# Altium PCB DK-PM-FV-VC-Buck_NonIsolated_V1.0.PcbDoc
Units mm, origin at the board's own origin, x right, y up, seen from the top; angles counter-clockwise.
Board outline 48.25 x 57.25 mm, 2 copper layers (Top Layer, Bottom Layer); 31 components, 19 nets, 82 pads, 0 vias.
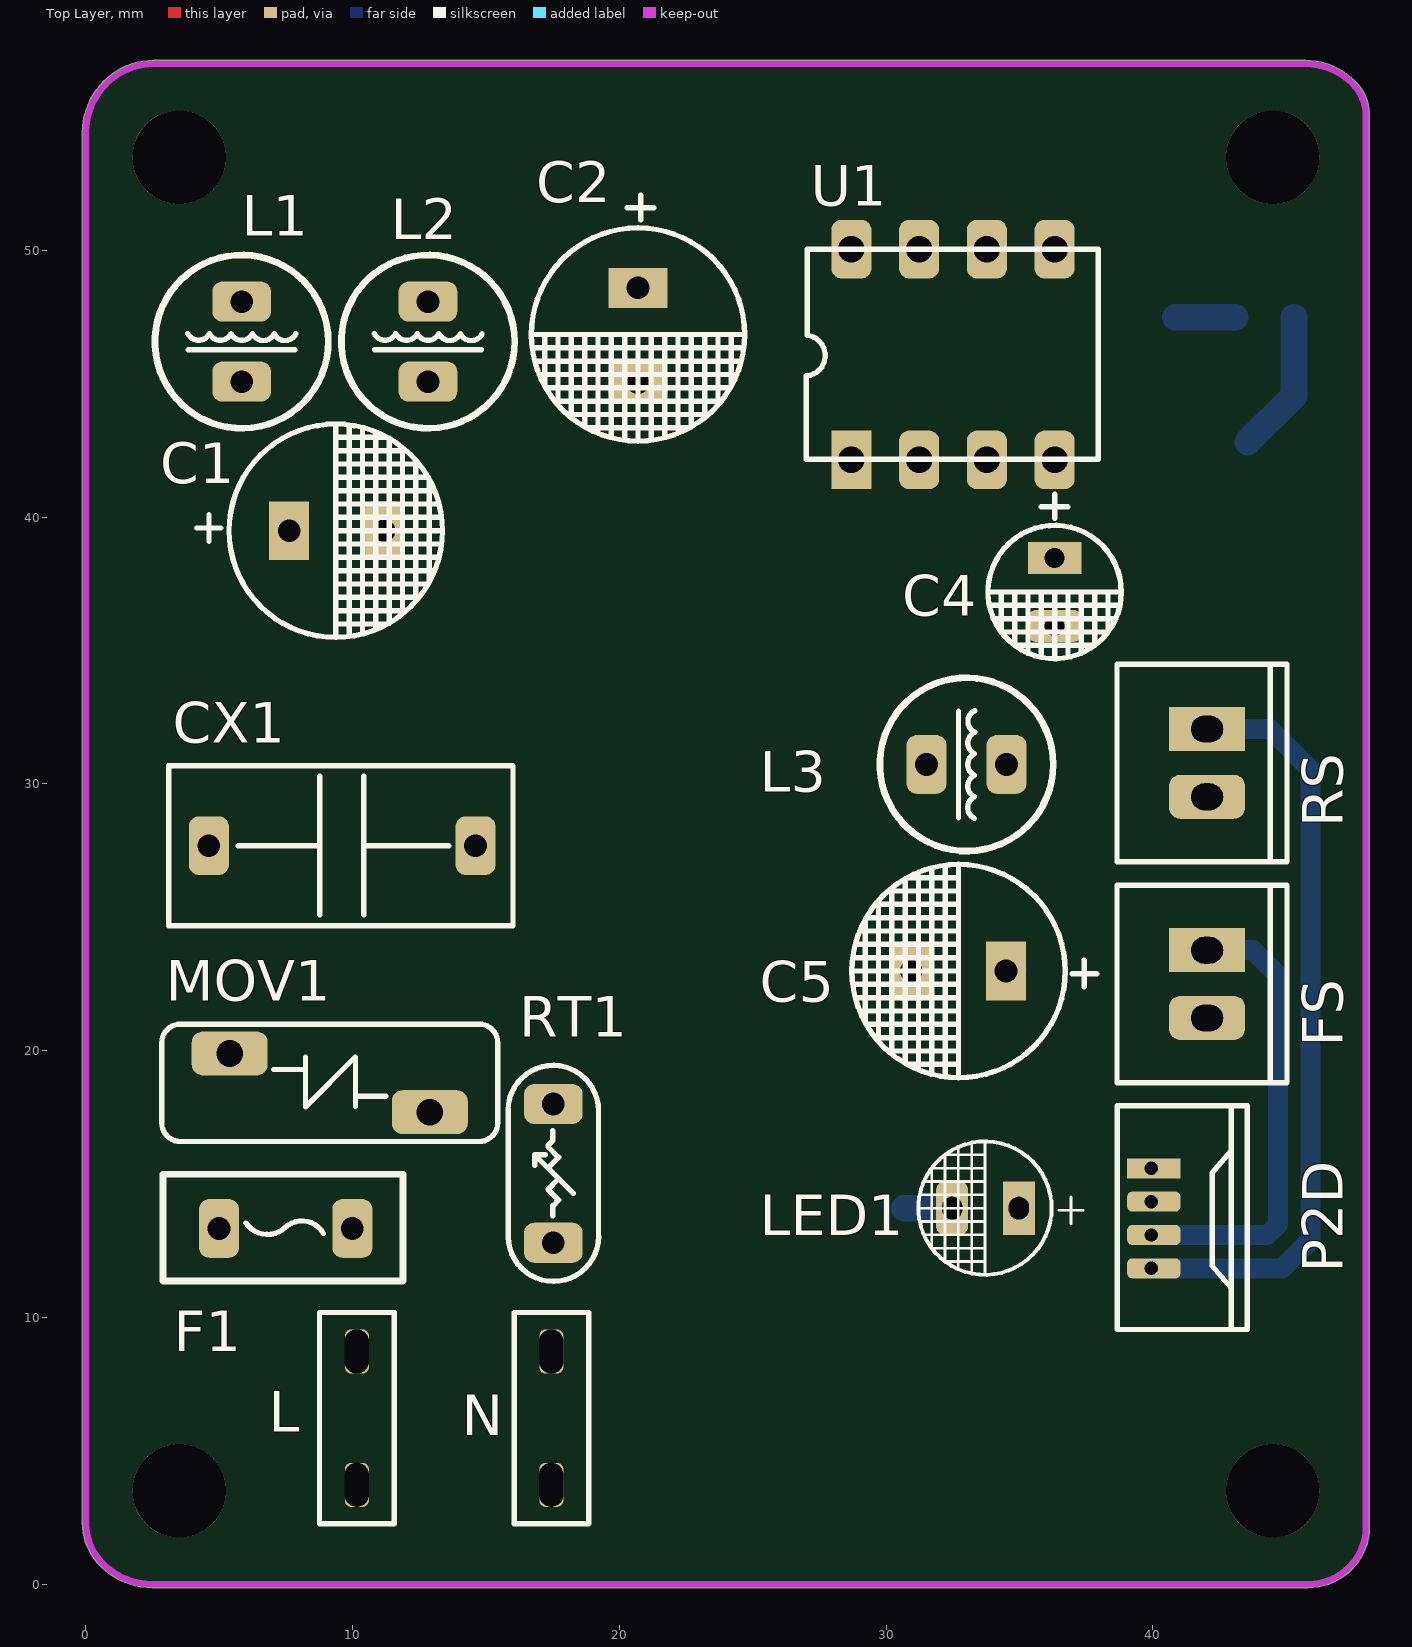
[diagram p0: Top Layer view]
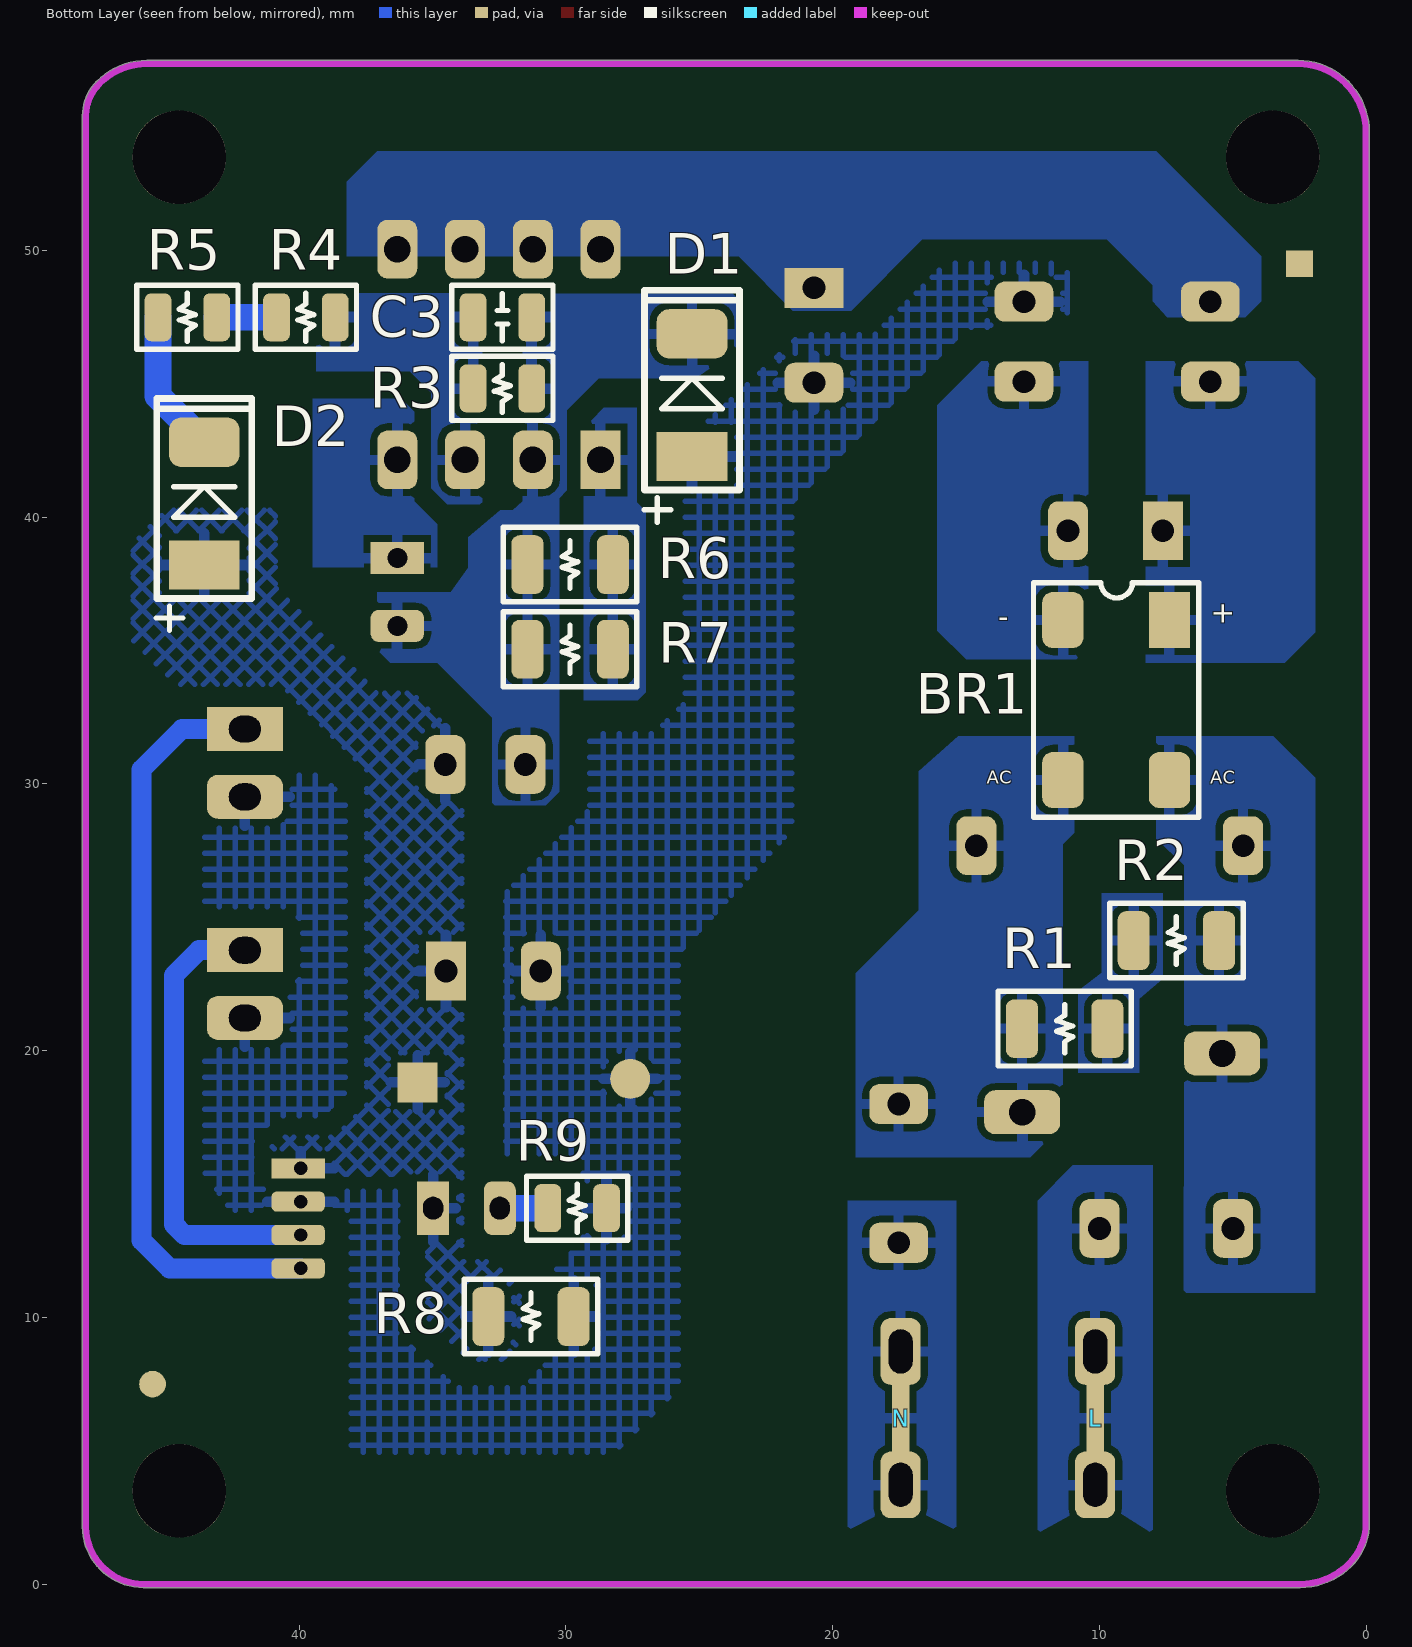
[diagram p1: Bottom Layer view, seen from below]
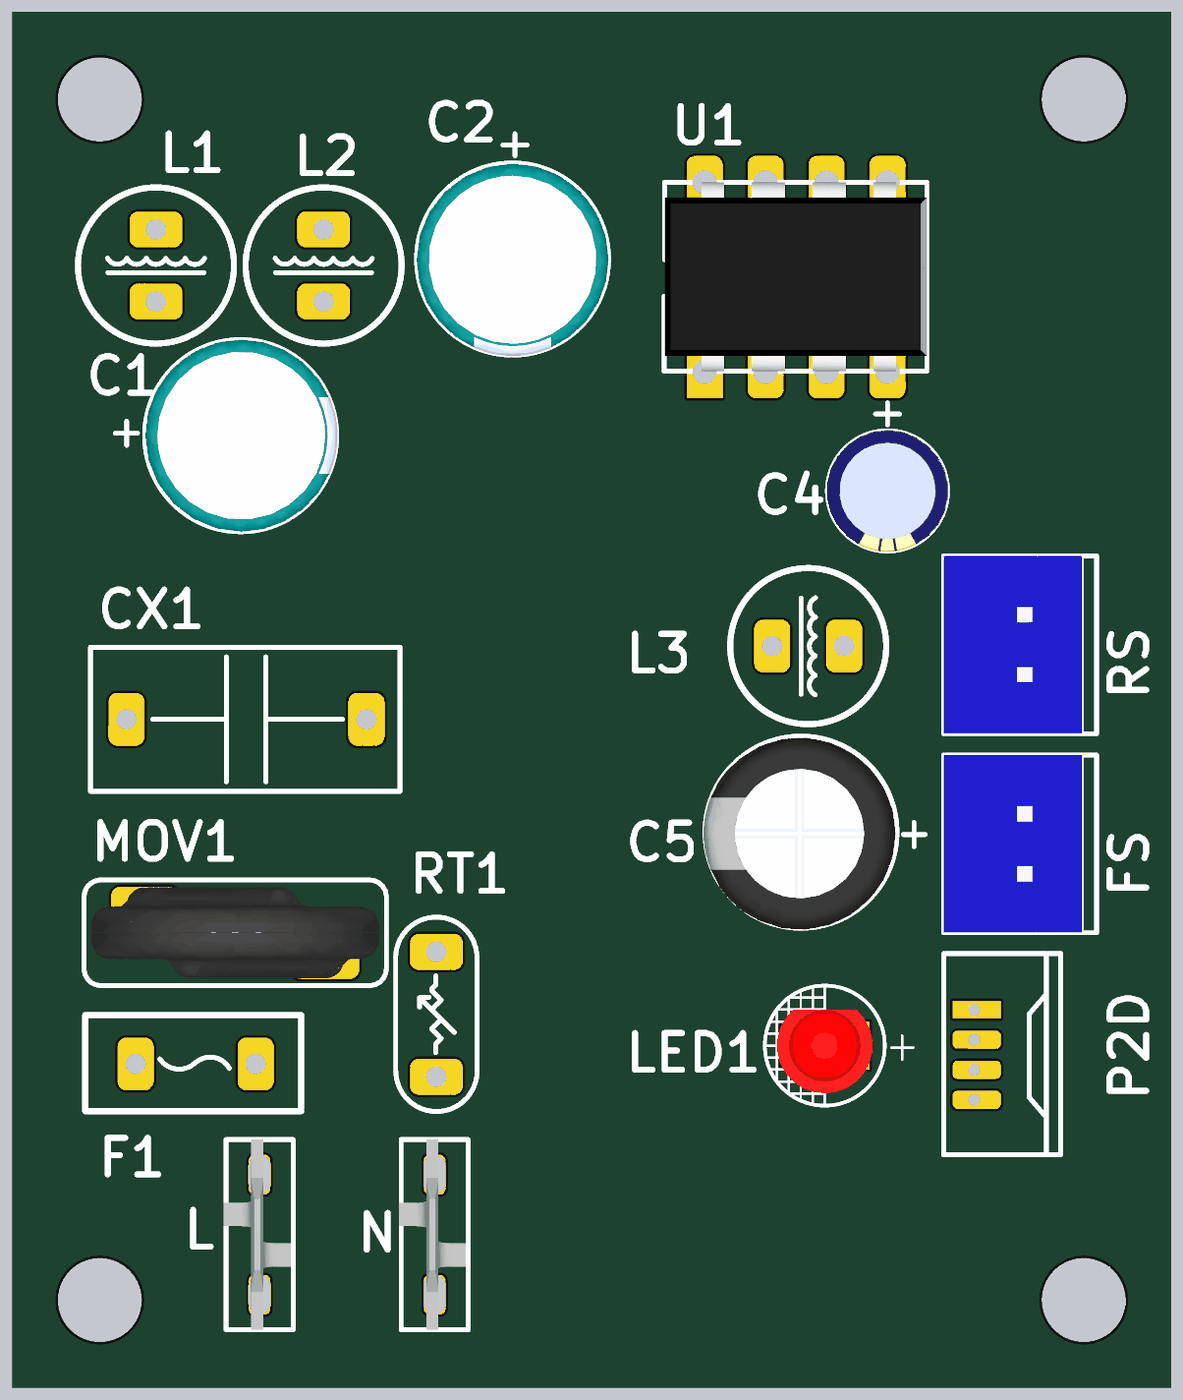
[diagram p2: 3D render of the assembled board from above, using the file's embedded part models]
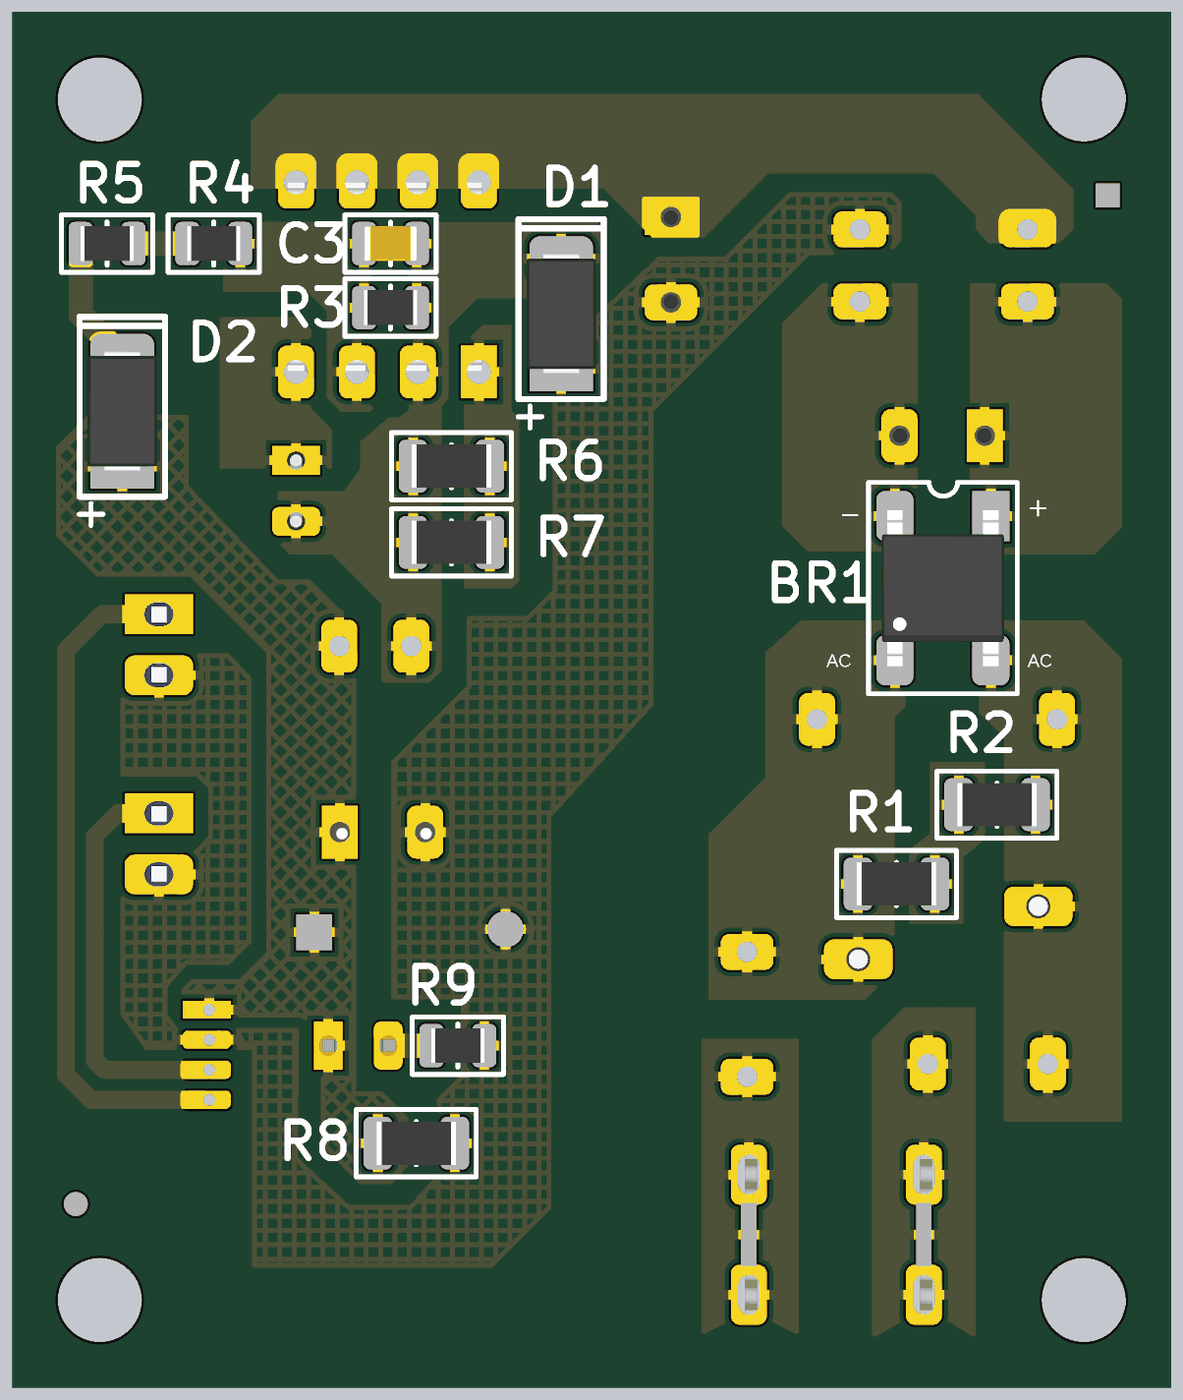
[diagram p3: 3D render of the assembled board from below, using the file's embedded part models]

## Layer stack, top to bottom
Top Solder: solder mask 0.0102, Solder Resist, Dk 3.5
Top Layer: signal copper 0.0356
Dielectric 1: dielectric 0.32, FR-4, Dk 4.8
Bottom Layer: signal copper 0.0356
Bottom Solder: solder mask 0.0102, Solder Resist, Dk 3.5

## Board outline
0.545,0.672 cw(c2.168,2.295) -0.127,2.295 -0.127,54.421 cw(c2.602,54.421) 0.672,56.351 cw(c2.546,54.477) 2.546,57.127 45.714,57.127 cw(c45.714,54.477) 47.588,56.351 cw(c46.286,55.049) 48.127,55.049 48.127,2.154 cw(c45.852,2.154) 47.461,0.545 cw(c45.838,2.168) 45.838,-0.127 2.475,-0.127 cw(c2.475,2.602)

## Design rules (kind name [scope] priority, off if disabled: settings)
Clearance [All] p1: gap=0.254 ignorepadtopadclearanceinfootprint=FALSE except(0: Arc-Hole Track-Hole SMDPad-Hole THPad-Hole Via-Hole Fill-Hole Poly-Hole Region-Hole Text-Hole)
HoleSize [All] p1: absolutevalues=TRUE maxlimit=5 minlimit=0.025 maxpercent=80.000 minpercent=20.000
PolygonConnect PolygonConnect_Power [(InNet('NetC2_1'))] p1: connectstyle=Direct reliefconductorwidth=0.254 reliefentries=4 polygonreliefangle="90 Angle" airgapwidth=0.254
PolygonConnect [All] p2: connectstyle=Relief reliefconductorwidth=0.4 reliefentries=4 polygonreliefangle="90 Angle" airgapwidth=0.254
RoutingLayers [All] p1: top layer_v5=FALSE bottom layer_v5=TRUE
RoutingVias [All] p1: holewidth=0.711 width=1.27 viastyle="Through Hole" minholewidth=0.711 minwidth=1.27 maxholewidth=3 maxwidth=4
SolderMaskExpansion [All] p1: expansion=0.102 istentingtop=FALSE
Width Width_Power_Line [(InNet('GND') AND InNet('VCC'))] p1: maxlimit=5 minlimit=0.4 preferedwidth=0.5
Width [All] p2: maxlimit=5 minlimit=0.254 preferedwidth=0.5
28 further rules are at their usual default settings.

## Components (designator, comment, footprint, x,y, rotation, side; value= is the part's Value field where it differs from the comment)
BR1 "ABS10 SOP-4" BR_SMD_ABS10 9.37,33.147 r90 bottom
C1 "Ø8*13mm  400V/4.7uF  105℃" C_8x13_P3.556 9.398,39.497 r0 top
C2 "Ø8*13mm  400V/4.7uF  105℃" C_8x13_P3.556 20.701,46.825 r270 top
C3 "0805 470pF 50V 20%" C_0805 32.385,47.498 r180 bottom
C4 "Ø5*12mm 22uF/25V 105℃ low ESR" C_5x12_P2.54 36.322,37.197 r270 top
C5 "Ø8*12mm  470uF/16V  105℃ low ESR" C_8x12_P3.556 32.72,22.987 r180 top
CX1 "0.1uF 275V 20%" C_X1_P10 9.612,27.686 r0 top
D1 "ES1J  DO-214AC" D_ES1J-DO-214AC 25.273,44.577 r90 bottom
D2 "ES1J  DO-214AC" D_ES1J-DO-214AC 43.561,40.513 r90 bottom
F1 "T 2A 250V" F_4x8_P5 7.493,13.335 r180 top
FS "FS" CN_B2B-XH-A_RED 42.037,22.497 r0 top
L "4.8mm PCB Tab Terminal (Straight)" "CN_4.8mm PCB Tab Terminal (Straight)" 10.16,6.223 r90 top
L1 "Ø6*10mm 1.5mH  0.2A" L_6x10_P3 5.842,46.585 r90 top
L2 "Ø6*10mm 1.5mH  0.2A" L_6x10_P3 12.827,46.585 r90 top
L3 "Ø6*10mm 470uH  0.3A" L_6x10_P3 33.02,30.734 r0 top
LED1 "Φ3*5mm, RED, Vf=3.2V, 20mA" LED_3x5_P2.5 33.731,14.097 r180 top
MOV1 "10D471" MOV_10D471 9.144,18.796 r0 top
N "4.8mm PCB Tab Terminal (Straight)" "CN_4.8mm PCB Tab Terminal (Straight)" 17.453,6.223 r90 top
P2D "P2D" CN_BM04B-GHS-TBT_180_DIP 39.942,13.716 r0 top
R1 "1206  1MΩ   5%" R_1206 11.303,20.828 r0 bottom
R2 "1206  1MΩ   5%" R_1206 7.112,24.13 r0 bottom
R3 "0805  4.7KΩ   1%" R_0805 32.385,44.831 r180 bottom
R4 "0805  5.1K   1%" R_0805 39.751,47.498 r180 bottom
R5 "0805  100Ω   1%" R_0805 44.196,47.498 r180 bottom
R6 "1206  1R  1%" R_1206 29.845,38.227 r0 bottom
R7 "1206  1R  1%" R_1206 29.845,35.052 r0 bottom
R8 "1206  470Ω   5%" R_1206 31.311,10.033 r180 bottom
R9 "0805 2.2K 5%" R_0805 29.58,14.097 r180 bottom
RS "RS" CN_B2B-XH-A_WHITE 42.037,30.789 r0 top
RT1 "5D-5" RT_5D-5-(B) 17.526,15.4 r90 top
U1 "DK912 DIP-8" U_DK912_TH 32.512,46.101 r0 top locked

## Footprints (in the part's own frame and the unit in brackets; to place one, negate y for a bottom-side part, rotate by r counter-clockwise, add the part's x,y. Pads: shape width x height; smd on the part's side, far side on the other; paste and mask are expansions set on the pad)
BR_SMD_ABS10 [mm]
  rrect50% 2.1x1.55 smd: 1(-3,2) 2(-3,-2) 4(3,2)
  rect 2.1x1.55 smd: 3(3,-2)
  silkscreen extent -4.4,-3.1 4.4,3.1, body extent -3.25,-2.55 3.25,2.55, height 1.6
C_5x12_P2.54 [mm]
  rect 1.2x2 hole 0.75: 1(-1.27,0)
  rrect50% 1.2x2 hole 0.75: 2(1.27,0)
  silkscreen extent -3.67,-2.5 2.5,2.5, body extent -2.54,-2.54 2.54,2.54, height 13.05
C_8x12_P3.556 [mm]
  rect 1.5x2.2 hole 0.85: 1(-1.778,0)
  rrect50% 1.5x2.2 hole 0.85: 2(1.778,0)
  silkscreen extent -5.18,-4 4,4, body extent -3.94,-3.94 4.06,4.06, height 12.55
C_8x13_P3.556 [mm]
  rect 1.5x2.2 hole 0.85: 1(-1.778,0)
  rrect50% 1.5x2.2 hole 0.85: 2(1.778,0)
  silkscreen extent -5.24,-4 3.97,4, body extent -4,-4 4.01,4, height 13.01
C_0805 [mm]
  rrect50% 1x1.8 smd: 1(-1.1,0) 2(1.1,0)
  silkscreen extent -1.9,-1.2 1.9,1.2, body extent -1.1,-0.73 1.1,0.72, height 1
C_X1_P10 [mm]
  rrect50% 1.5x2.2 hole 0.85: 1(-5,0) 2(5,0)
  silkscreen extent -6.5,-3 6.4,3, body extent -6.41,-2.92 6.35,2.92, height 11.89
"CN_4.8mm PCB Tab Terminal (Straight)" [mm]
  rrect50% 1.65x0.9 / inner rrect50% 1.65x0.9 / far side rrect50% 2.5x1.5 hole 0.9 slot 1.65 at 0 deg: 1(-2.5,0) 1(2.5,0)
  rect 2.65x0.65 smd far side: 1(0,0)
  silkscreen extent -3.96,-1.4 3.96,1.4, body extent -3.96,-1.3 3.96,1.49, height 9
CN_B2B-XH-A_RED [mm]
  rect 2.85x1.65 hole 1.2 slot 1 at 90 deg: 1(0,1.27)
  rrect50% 2.85x1.65 hole 1.2 slot 1 at 90 deg: 2(0,-1.27)
  silkscreen extent -3.38,-3.7 3,3.7, body extent -3.38,-3.7 2.37,3.7, height 7
CN_B2B-XH-A_WHITE [mm]
  rect 2.85x1.65 hole 1.2 slot 1 at 90 deg: 1(0,1.27)
  rrect50% 2.85x1.65 hole 1.2 slot 1 at 90 deg: 2(0,-1.27)
  silkscreen extent -3.38,-3.7 3,3.7, body extent -3.38,-3.7 2.37,3.7, height 7
CN_BM04B-GHS-TBT_180_DIP [mm] "Top Entry Header 1.25mm pitch 1X4pin  180° long"
  rect 2x0.75 hole 0.5 copper offset 0.1,0: 1(0,1.875)
  rrect50% 2x0.75 hole 0.5 copper offset 0.1,0: 2(0,0.625) 3(0,-0.625) 4(0,-1.875)
  silkscreen extent -1.28,-4.17 3.6,4.22
D_ES1J-DO-214AC [mm] "Molded Diode, 2-Leads, Body 4.29x2.69mm, IPC Medium Density"
  rect 1.85x2.65 smd: 1(-2.3,0)
  rrect50% 1.85x2.65 smd: 2(2.3,0)
  silkscreen extent -4.76,-1.78 3.94,1.8, body extent -2.52,-1.45 2.52,1.45, height 2.44
F_4x8_P5 [mm]
  rrect50% 1.5x2.2 hole 0.85: 1(-2.5,0) 2(2.5,0)
  silkscreen extent -4.4,-2.03 4.6,1.97, body extent -4.51,-1.97 4.51,1.97, height 7
L_6x10_P3 [mm]
  rrect50% 1.5x2.2 hole 0.85: 1(-1.5,0) 2(1.5,0)
  silkscreen extent -3.25,-3.25 3.25,3.25, body extent -3.24,-3.32 3.26,3.18, height 13
LED_3x5_P2.5 [mm]
  rect 1.2x2 hole 0.85 slot 0.75 at 0 deg: 1(-1.25,0)
  rrect50% 1.2x2 hole 0.85 slot 0.75 at 0 deg: 2(1.25,0)
  silkscreen extent -3.67,-2.5 2.52,2.5, body extent -1.97,-1.5 2.01,1.99, height 5.38
MOV_10D471 [mm]
  rrect50% 2.85x1.65 hole 1: 1(-3.75,1.1) 2(3.75,-1.1)
  silkscreen extent -6.3,-2.2 6.3,2.2, body extent -6,-1.9 6,1.9, height 13.55
R_0805 [mm]
  rrect50% 1x1.8 smd: 1(-1.1,0) 2(1.1,0)
  silkscreen extent -1.9,-1.2 1.9,1.2, body extent -1.1,-0.73 1.1,0.72, height 0.65
R_1206 [mm]
  rrect50% 1.2x2.2 smd: 1(-1.6,0) 2(1.6,0)
  silkscreen extent -2.5,-1.4 2.5,1.4, body extent -1.65,-0.9 1.65,0.9, height 0.65
RT_5D-5-(B) [mm]
  rrect50% 1.5x2.2 hole 0.85: 1(-2.6,0) 2(2.6,0)
  silkscreen extent -4.05,-1.7 4.05,1.7, body extent -2.9,-1.64 2.9,1.69, height 6.75
U_DK912_TH [mm]
  rect 1.5x2.2 hole 1: 1(-3.81,-3.95)
  rrect50% 1.5x2.2 hole 1: 2(-1.27,-3.95) 3(1.27,-3.95) 4(3.81,-3.95) 5(3.81,3.95) 6(1.27,3.95) 7(-1.27,3.95) 8(-3.81,3.95)
  silkscreen extent -5.5,-3.92 5.45,3.95, body extent -5.47,-3.92 5.45,3.95, height 5.58

## Part data
BR1: library part "Bridge Rectifier"
C1 C2 C4 C5: library part "Capacitor Polar"
C3 CX1: library part "Capacitor Non-Polar"
D1 D2: library part Diode
F1: library part Fuse
FS RS: library part Connector_2PINs
L N: library part Connector_1PIN
L1 L2 L3: library part Inductor
LED1: library part LED
MOV1: library part Varistor
P2D: library part Connector_4PINs
R1 R3 R4 R5 R6 R7 R8 R9: library part Resistor
R2: library part Resistor, "1206  1MO   5%"
RT1: library part Thermistor
U1: library part IC_SMPS_8pin

## Free pads (board coordinates)
  rect 1x1 smd far side: 0(2.5,49.5)
  round 3.5 hole 3.5 unplated: 0(3.5,3.5) 0(3.5,53.5) 0(44.5,3.5) 0(44.5,53.5)
  round 1.5 smd far side: 0(27.593,18.943)
  rect 1.5x1.5 smd far side: 0(35.56,18.816)
  round 1 smd far side: 0(45.5,7.5)

## Nets (pads, with @x,y where several pads share a name; then routed paths per layer and width w, separated by ;. In a path a pad name is that pad's centre, name@x,y a point inside that pad or via, vN(x,y) a via of type N, cw(c..) or ccw(c..) an arc to the next point about the centre after c; other vN are vias at no path point)
GND: C2.2 C5.2 D1.1 FS.2 L2.2 P2D.2 pad.0@27.593,18.943 R8.2 R9.2 RS.2
Line: BR1.2 CX1.1 F1.2 MOV1.1 R2.1
NetBR1_3: BR1.3 C1.1 L1.1
NetBR1_4: BR1.4 C1.2 L2.1
NetC2_1: C2.1 L1.2 U1.5 U1.6 U1.7 U1.8
NetC3_1: C3.1 R3.1 R4.2 U1.3
NetC3_2: C3.2 C4.2 D1.2 L3.1 R3.2 R6.2 R7.2 U1.2
NetC4_1: C4.1 U1.4
NetD2_2: D2.2 R5.1 | length 5.4
  Bottom Layer w1: D2.2 45.296,44.548 R5.1
NetF1_1: F1.1 L.1
NetFS_1: FS.1 P2D.3 | length 17.3
  Bottom Layer w0.75: P2D.3 44.306,13.091 44.704,13.489 44.704,22.822 43.759,23.767 FS.1
NetLED1_2: LED1.2 R9.1 | length 1.8
  Bottom Layer w1: R9.1 LED1.2
NetN_1: N.1 RT1.1
NetP2D_4: P2D.4 RS.1 | length 28.6
  Bottom Layer w0.75: P2D.4 44.861,11.841 45.911,12.891 45.911,30.543 44.395,32.059 RS.1
NetR1_1: R1.1 R2.2
NetR4_1: R4.1 R5.2 | length 2.2
  Bottom Layer w1: R4.1 R5.2
NetR6_1: R6.1 R7.1 U1.1
Neutral: BR1.1 CX1.2 MOV1.2 R1.2 RT1.2
VCC: C5.1 D2.1 L3.2 LED1.1 P2D.1 pad.0@35.56,18.816 R8.1 | length 0
  Bottom Layer w1.5: C5.1 C5.1@34.52,23.009

## Polygon pours and split planes (outlines as drawn)
NetN_1 on Bottom Layer "Bottom Layer-NetN_1" (solid, remove dead copper, pour order 32): 15.367,14.384 15.367,2.032 17.399,3.048 19.431,2.032 19.431,14.384
NetF1_1 on Bottom Layer "Bottom Layer-NetF1_1" (solid, remove dead copper, pour order 30): 8.001,1.905 10.063,3.175 12.319,1.905 12.319,14.384 11.003,15.7 8.001,15.7
VCC on Bottom Layer "Bottom Layer-No Net" (hatched 45Degree grid 0.6 track 0.203, remove dead copper, pour order 22): 40.894,40.259 44.958,40.259 46.228,38.989 46.228,35.385 44.573,33.73 40.675,33.73 37.465,30.52 37.465,17.932 38.633,16.764 40.64,16.764 41.021,16.383 41.021,15.367 36.065,15.367 35.179,14.481 35.179,10.001 33.601,8.423 32.385,8.423 31.75,9.133 31.75,11.052 32.795,12.097 33.909,12.097 33.909,31.541 35.769,33.401 37.106,33.401 40.894,37.362
NetC3_1 on Bottom Layer "Bottom Layer-NetC3_1" (solid, remove dead copper, pour order 20): 33.147,40.565 33.239,40.479 34.444,40.479 35.052,41.087 35.052,44.67 35.863,45.481 38.559,45.481 39.37,45.481 39.37,46.292 39.37,48.398 33.147,48.398
NetC4_1 on Bottom Layer "Bottom Layer-NetC4_1" (solid, remove dead copper, pour order 18): 34.82,38.127 34.82,39.739 35.687,40.606 35.687,43.95 36.172,44.435 39.497,44.435 39.497,38.127
GND on Bottom Layer "Bottom Layer-GND" (hatched 90Degree grid 0.6 track 0.203, remove dead copper, pour order 16): 11.557,49.53 15.737,49.53 18.414,46.853 21.194,46.853 25.527,42.784 25.527,41.021 25.527,33.04 26.68,31.887 29.11,31.887 29.11,29.056 32.258,25.908 32.258,18.686 32.258,16.129 29.357,16.129 29.357,12.843 30.353,11.846 30.353,8.684 31.524,7.366 34.158,7.366 36.347,9.382 36.298,14.732 41.304,14.732 41.783,15.351 41.783,16.574 40.908,17.557 39.157,17.557 38.277,18.438 38.277,20.828 38.277,29.368 39.157,30.326 43.542,30.326 43.542,25.4 40.433,25.4 39.878,24.845 39.878,22.806 40.415,22.192 43.542,22.192 43.542,15.427 42.545,14.014 38.049,14.014 38.049,4.953 28.194,4.953 25.781,7.366 25.781,23.66 21.53,28.312 21.53,40.569 14.983,47.117 11.668,47.117 11.196,47.665 11.196,49.169
NetR1_1 on Bottom Layer "Bottom Layer-NetR1_1" (solid, remove dead copper, pour order 14): 7.62,25.908 9.906,25.908 9.906,22.925 10.795,22.244 10.795,19.177 8.509,19.177 8.509,21.944 7.62,22.693
NetR6_1 on Bottom Layer "Bottom Layer-NetR6_1" (solid, remove dead copper, pour order 12): 27.345,40.558 27.012,40.225 27.012,33.44 27.305,33.147 29.335,33.147 29.335,40.748 29.335,43.346 28.575,44.106 27.345,44.106
NetC3_2 on Bottom Layer "Bottom Layer-NetC3_2" (solid, remove dead copper, pour order 10): 25.142,45.212 28.777,45.212 29.972,44.017 29.972,41.007 30.258,40.72 30.258,29.71 30.758,29.21 32.766,29.21 32.766,32.48 34.83,34.544 36.582,34.544 37.084,35.046 37.084,37.197 34.322,37.197 33.655,38.106 33.655,39.243 32.47,40.259 31.996,40.259 31.623,40.593 31.623,48.085 31.321,48.387 23.754,48.387 23.495,48.133 23.495,46.355
NetC2_1 on Bottom Layer "Bottom Layer-NetC2_1" (solid, remove dead copper, pour order 8): 4.534,47.498 7.461,47.498 8.001,48.096 8.001,48.693 9.727,50.419 16.637,50.419 19.304,47.752 21.488,47.752 23.52,49.784 38.227,49.784 38.227,52.578 37.084,53.721 7.874,53.721 3.937,49.784 3.937,48.095
NetBR1_4 on Bottom Layer "Bottom Layer-NetBR1_4" (solid, remove dead copper, pour order 6): 10.823,34.671 10.414,35.162 10.414,45.847 14.425,45.847 16.077,44.195 16.077,35.755 14.993,34.671
Neutral on Bottom Layer "Bottom Layer-Neutral" (solid, remove dead copper, pour order 4): 10.939,28.177 10.939,31.797 13.255,31.797 15.292,31.797 16.764,30.48 16.764,25.273 19.139,22.898 19.139,16 12.592,16 11.376,17.216 11.376,27.74 10.494,28.622
Line on Bottom Layer "Bottom Layer-Line" (solid, remove dead copper, pour order 2): 1.905,30.226 3.476,31.797 7.874,31.797 7.874,27.949 6.812,26.961 6.841,10.922 1.905,10.922
NetBR1_3 on Bottom Layer "Bottom Layer-NetBR1_3" (solid, remove dead copper, pour order 0): 2.54,45.847 8.255,45.847 8.255,34.544 3.048,34.544 1.905,35.687 1.905,45.212

## Keep-outs
Keep-Out Layer:
  lines w0.254: 44.577,0 45.838,0 ccw(c45.838,2.168) 47.371,0.635 ccw(c45.852,2.154) 48,2.154 48,3 48,54 48,55.049 ccw(c46.286,55.049) 47.498,56.261 ccw(c45.714,54.477) 45.714,57 45,57 3,57 2.546,57 ccw(c2.546,54.477) 0.762,56.261 ccw(c2.602,54.421) 0,54.421 0,54 0,3 0,2.295 ccw(c2.168,2.295) 0.635,0.762 ccw(c2.475,2.602) 2.475,0 3,0 45,0

## Text inside footprints (layer, text, board x,y; h text height)
BR1: Bottom Overlay "+" at 5.712,35.927 h0.8 r90; Bottom Overlay "-" at 13.784,36.497 h0.8 r180; Bottom Overlay "AC" at 14.224,29.845 h0.85; Bottom Overlay "AC" at 5.842,29.845 h0.85